# Altium PCB Proyecto_receptaculo_placa_interna_PCB.PcbDoc
Units mm, origin at the board's own origin, x right, y up, seen from the top; angles counter-clockwise.
Board outline 59.99 x 60 mm, 4 copper layers (Top Layer, Sources, Ground, Bottom Layer), stack 0.603 mm thick; 18 components, 16 nets, 66 pads, 43 vias.
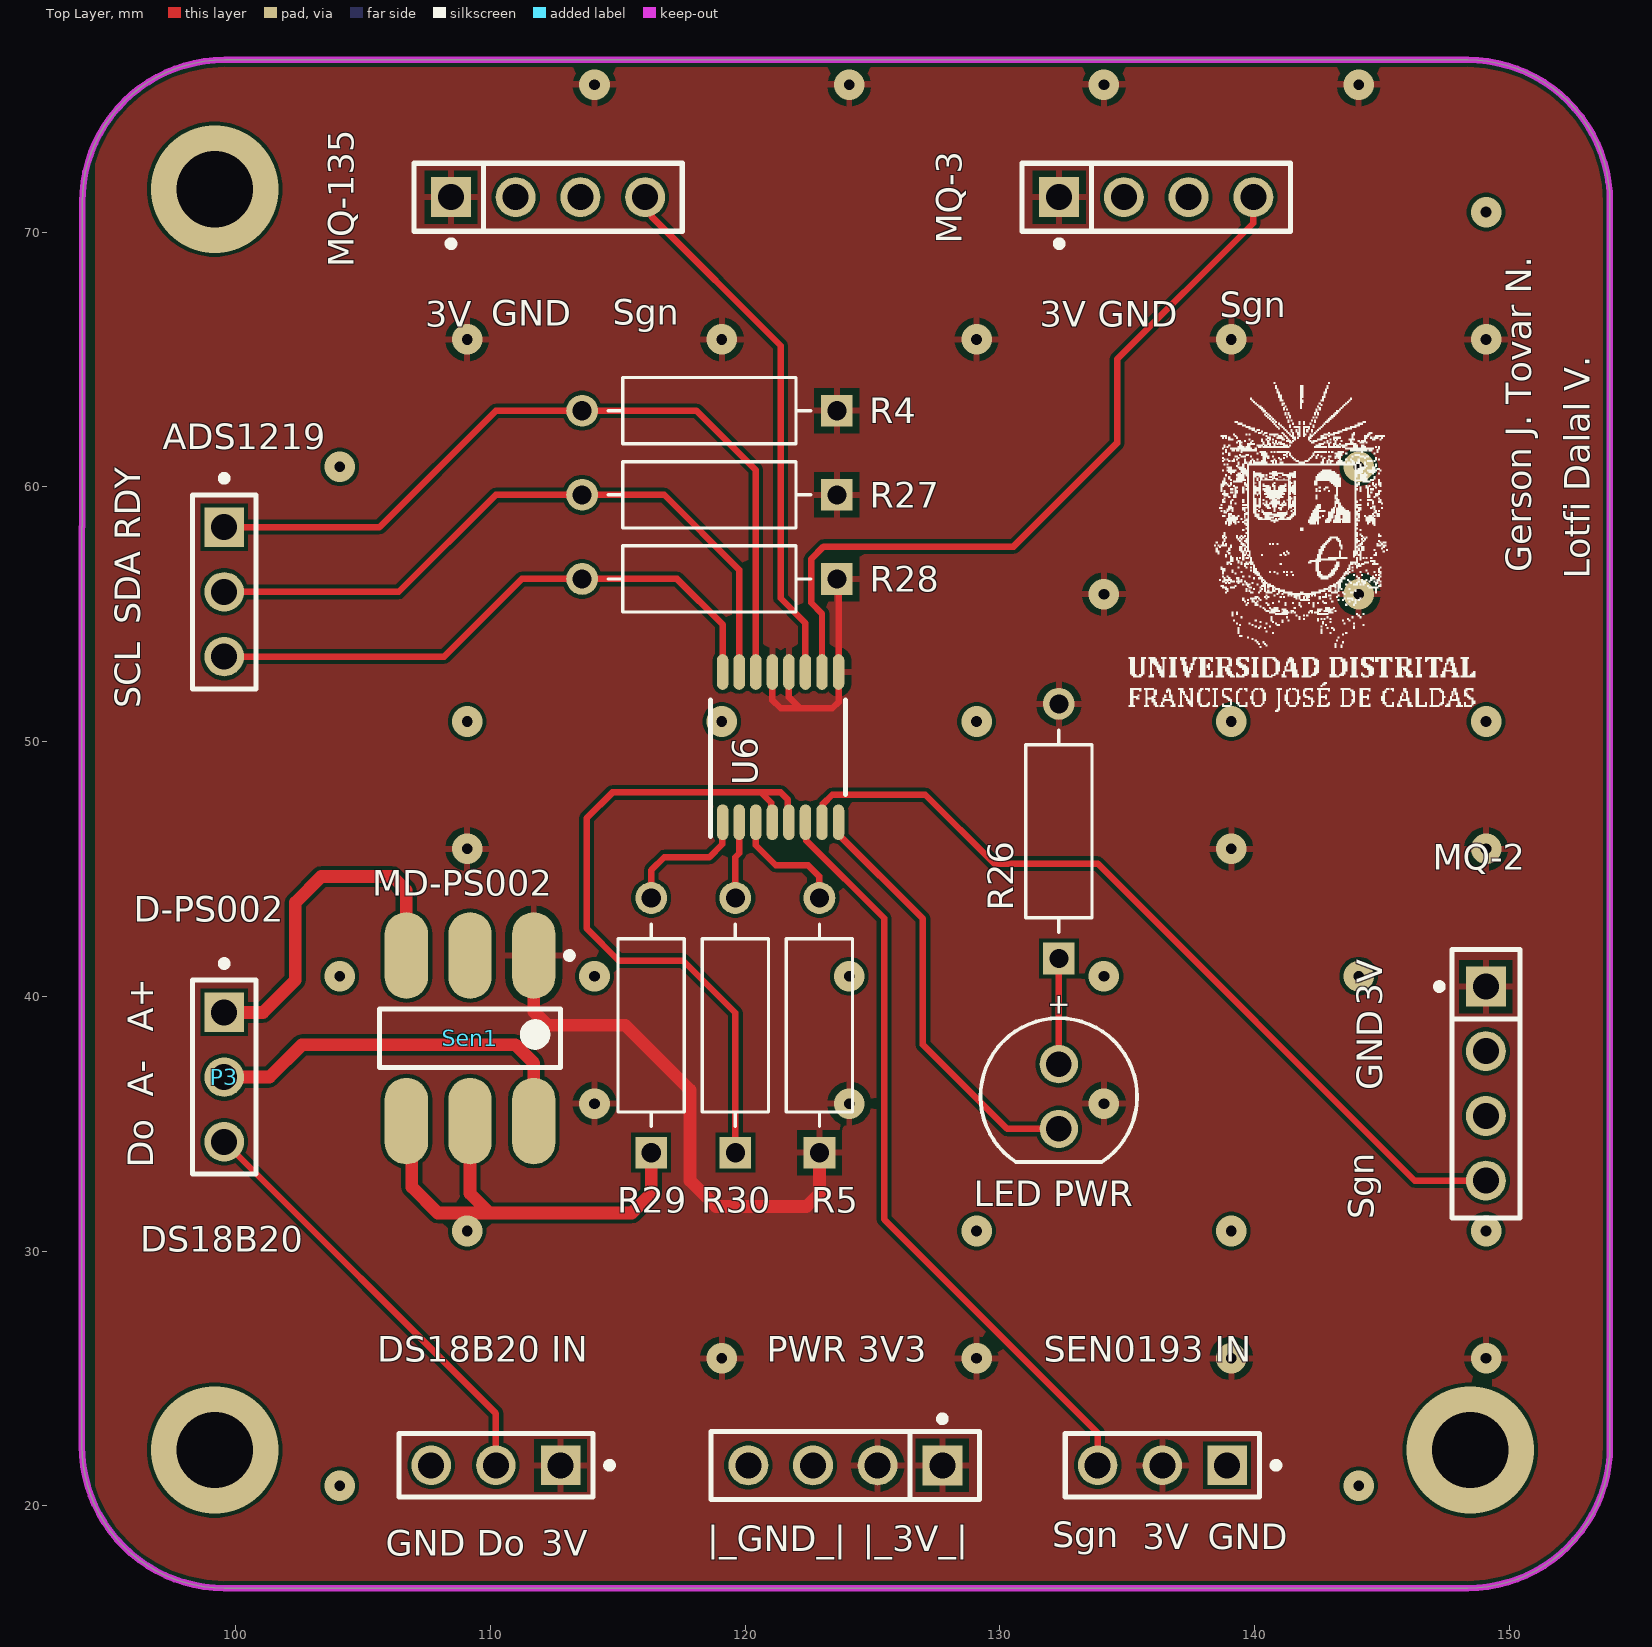
[diagram p0: Top Layer view]
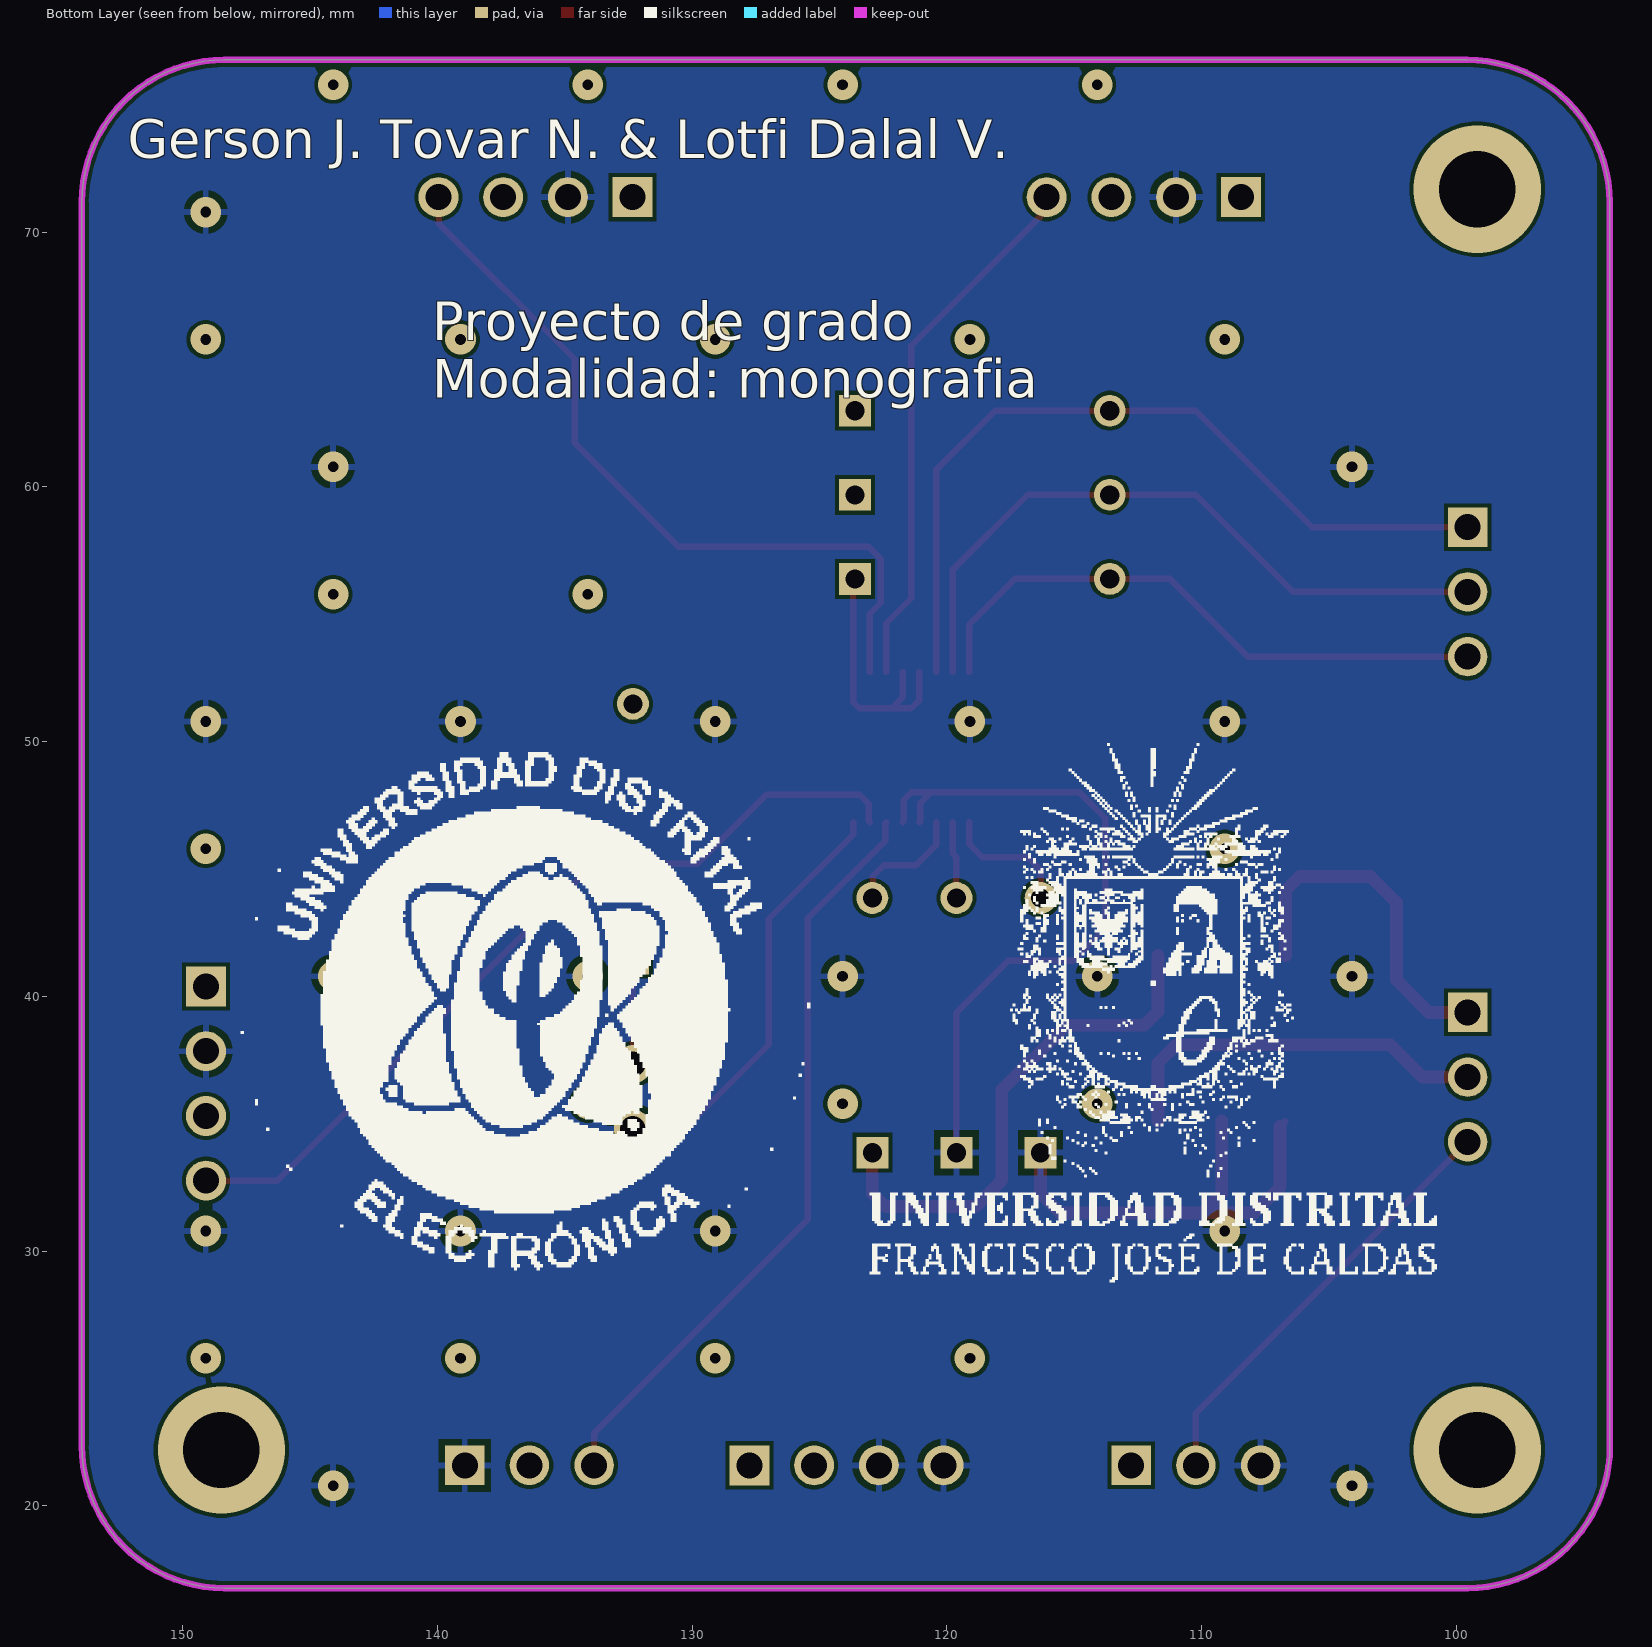
[diagram p1: Bottom Layer view, seen from below]
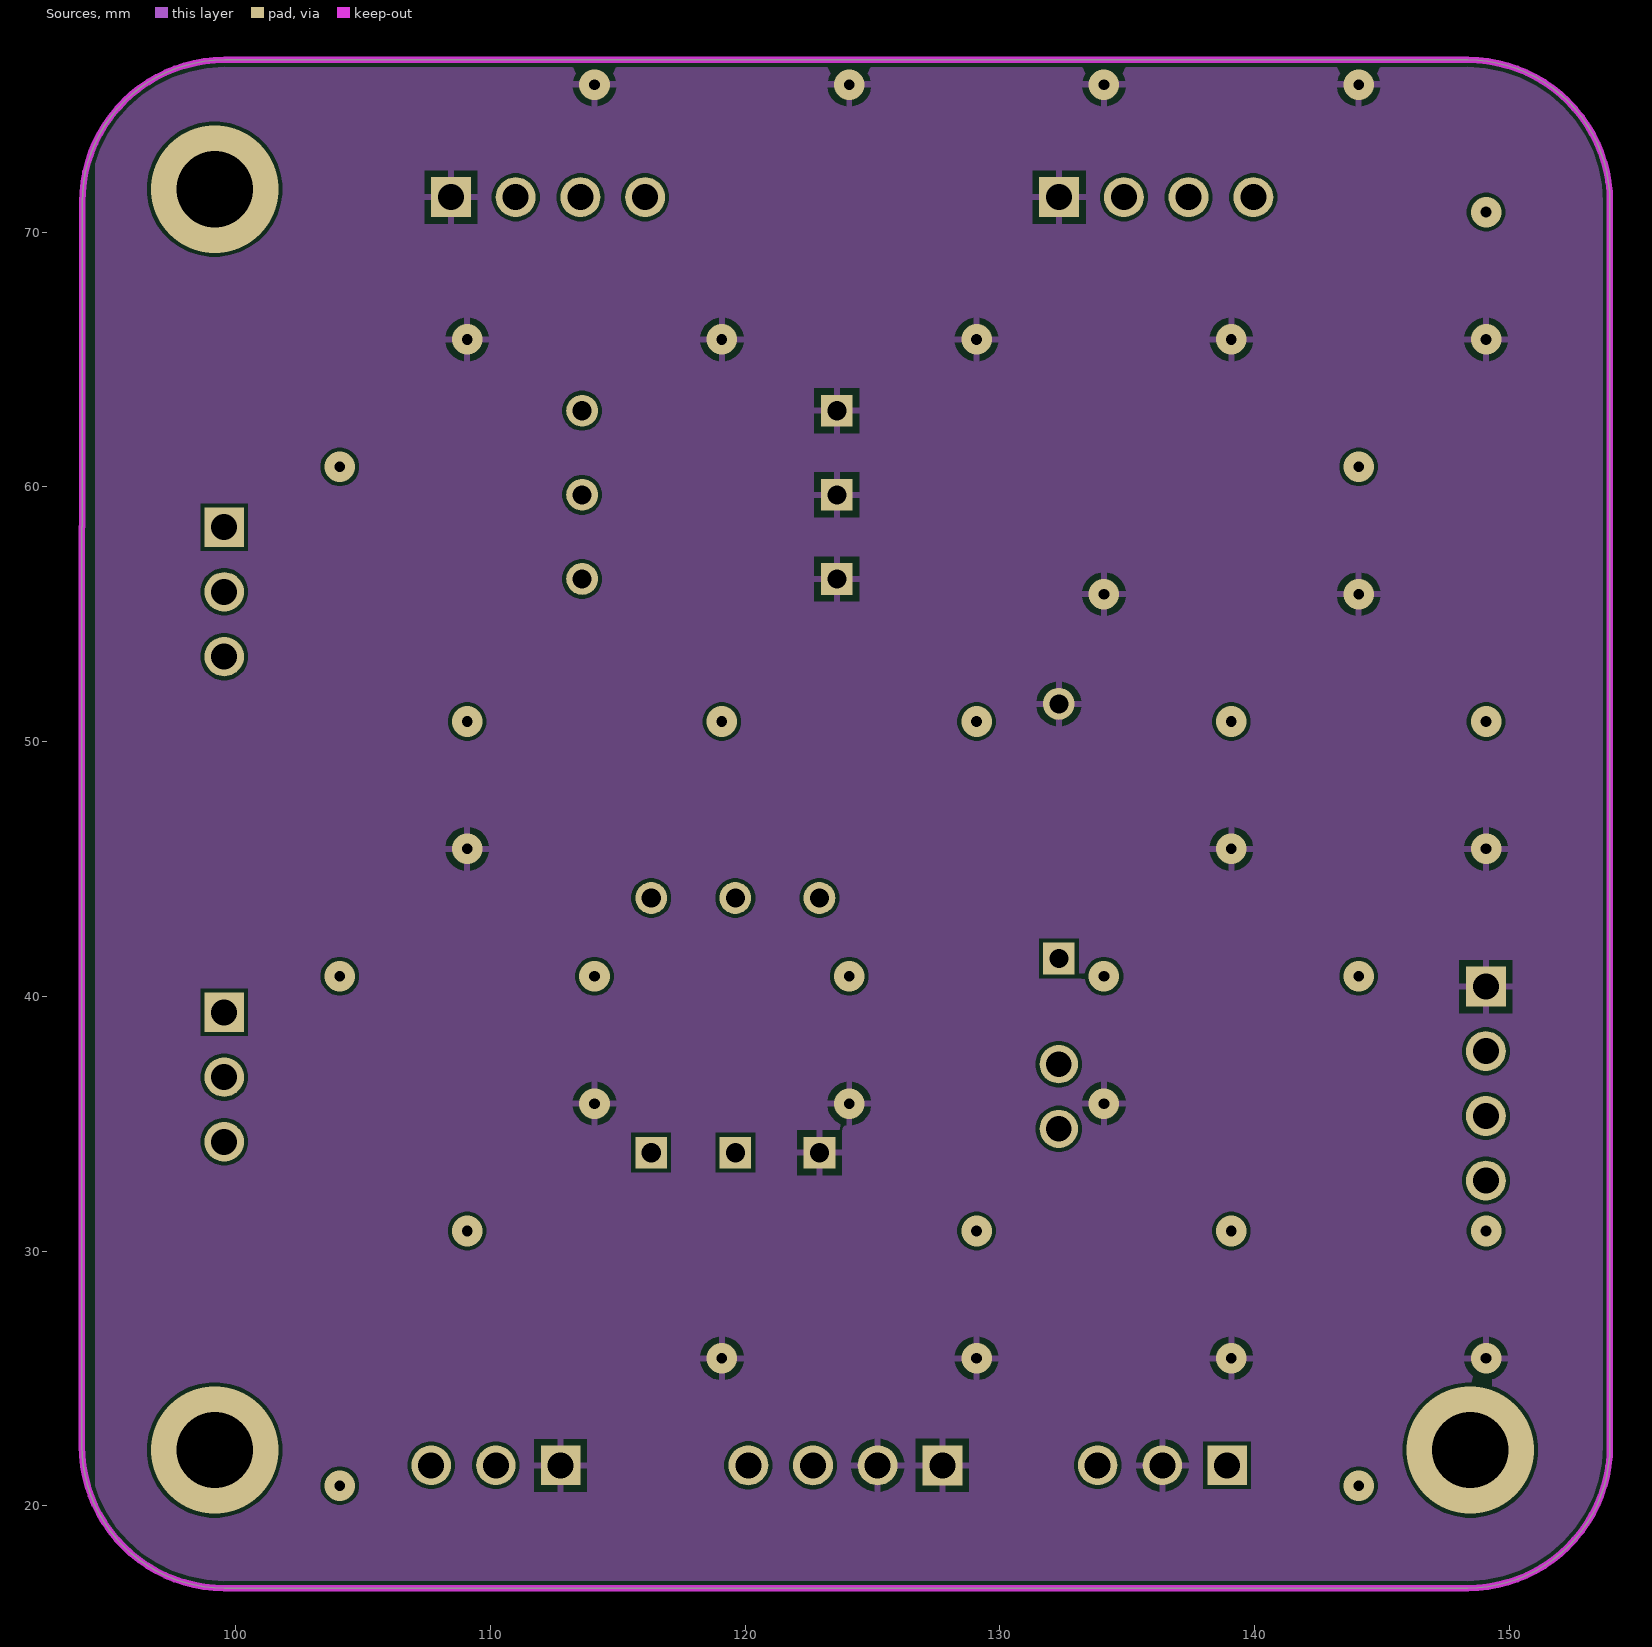
[diagram p2: Sources]
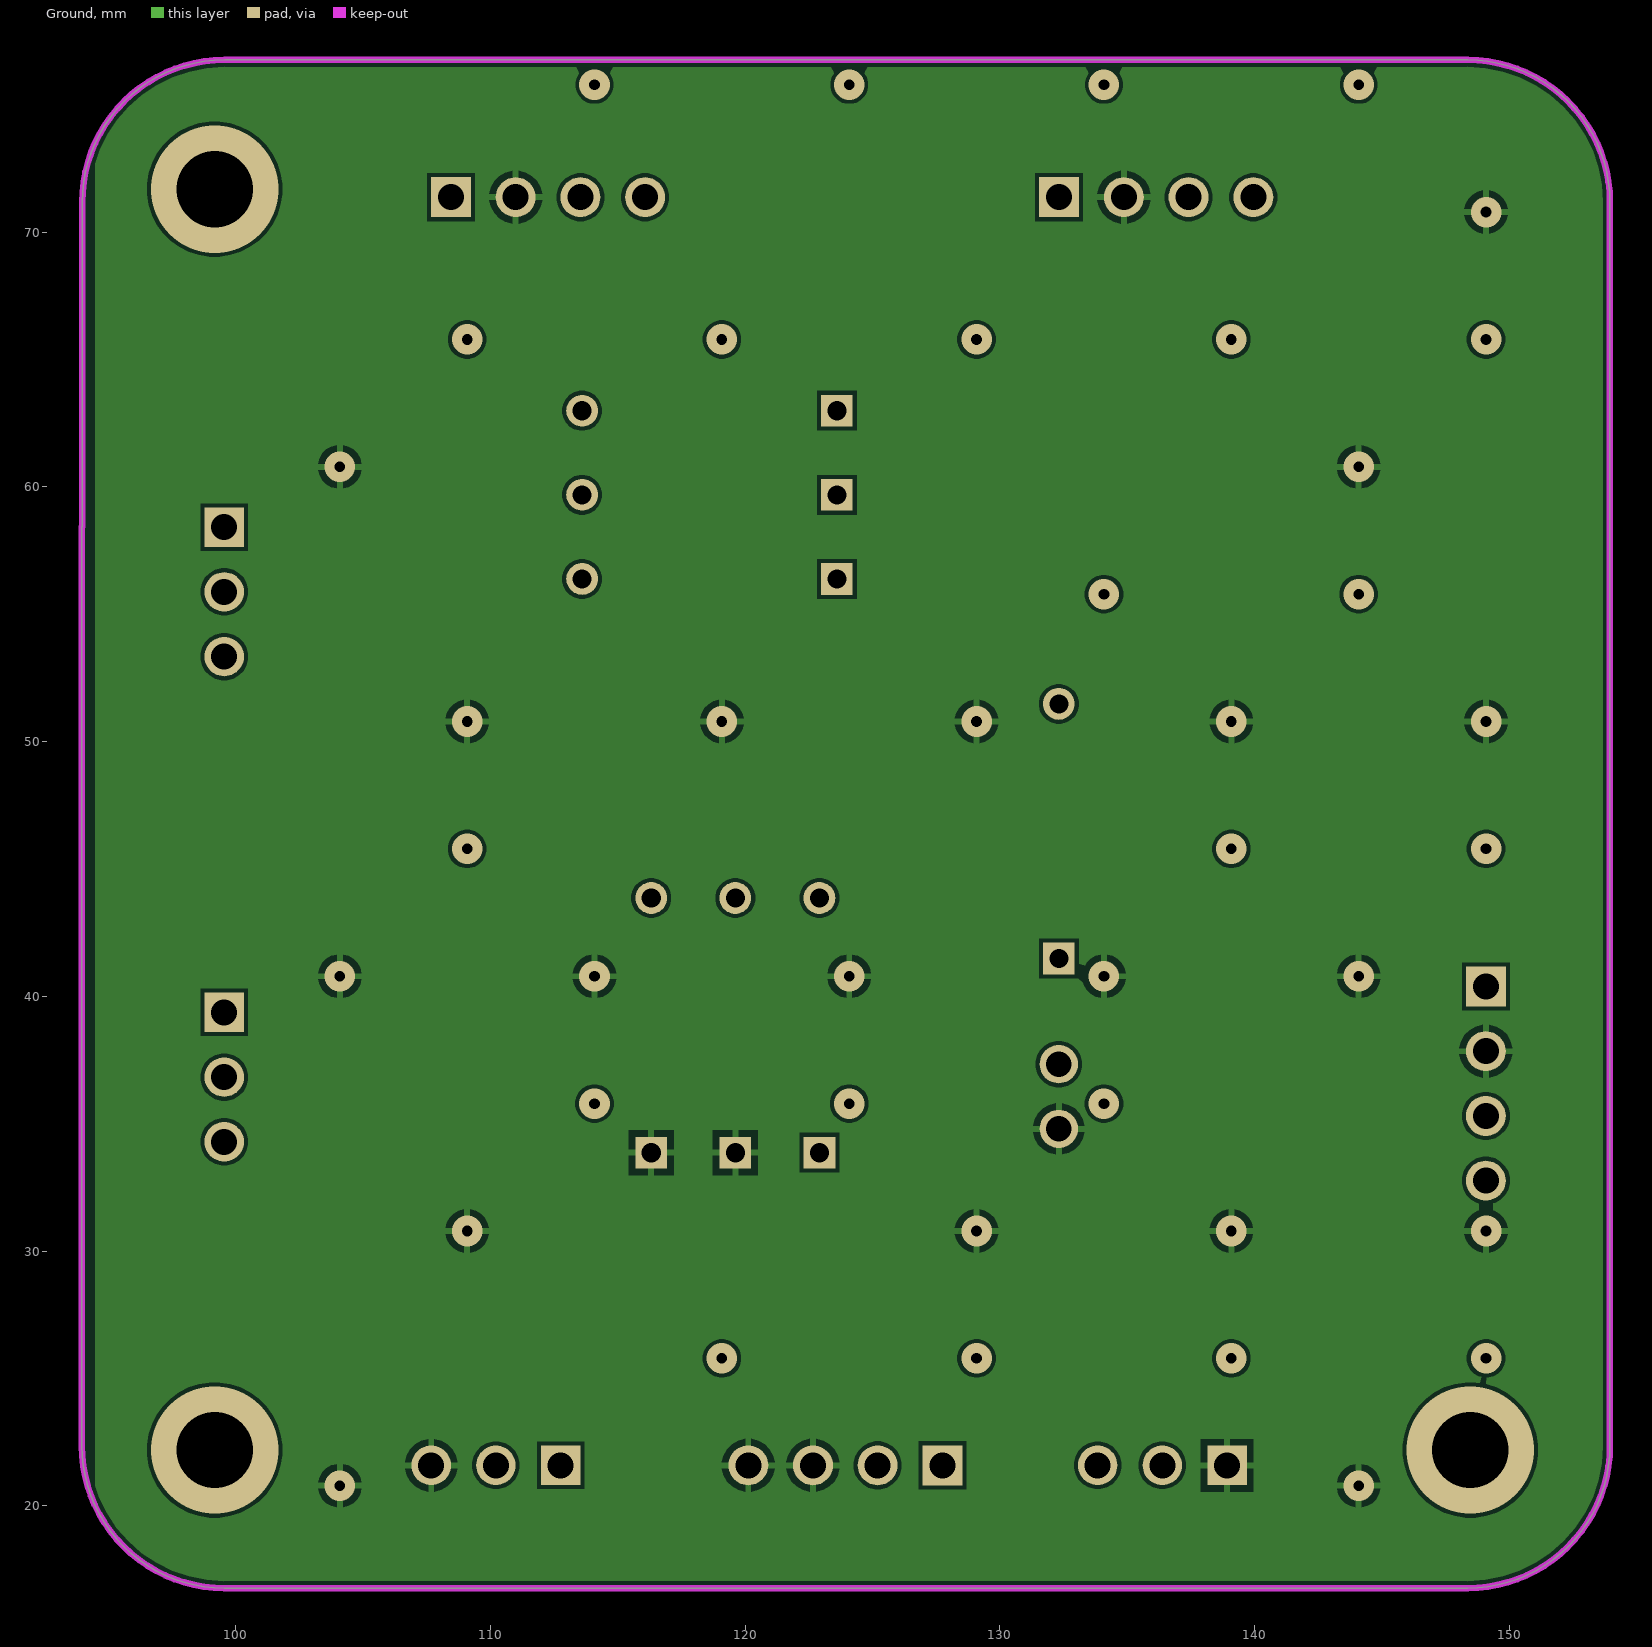
[diagram p3: Ground]
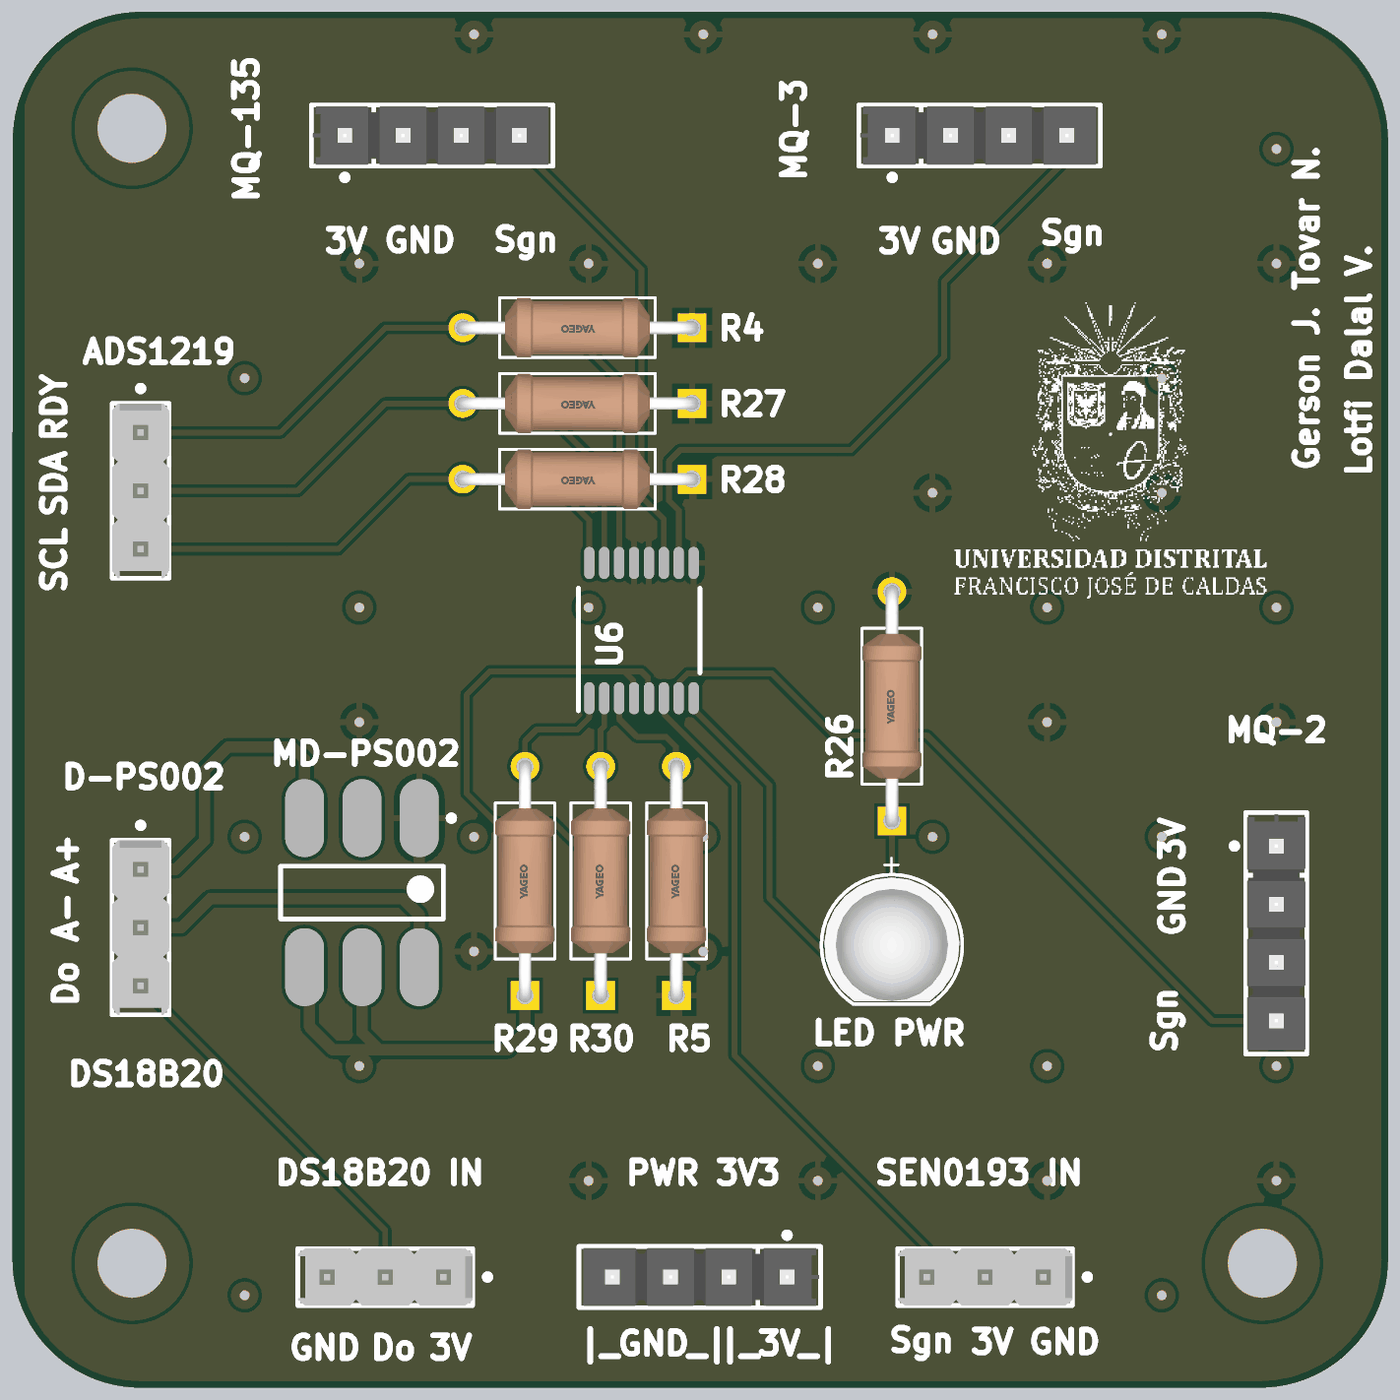
[diagram p4: 3D render of the assembled board from above, using the file's embedded part models]

## Layer stack, top to bottom
Top Solder: solder mask 0.0102, Solder Resist, Dk 3.5
Top Layer: signal copper 0.0356
Dielectric 2: prepreg 0.0711, PP-006, Dk 4.1
Sources: signal copper 0.035
Dielectric 1: dielectric 0.32, FR-4, Dk 4.8
Ground: signal copper 0.035
Dielectric 3: prepreg 0.0711, PP-006, Dk 4.1
Bottom Layer: signal copper 0.0356
Bottom Solder: solder mask 0.0102, Solder Resist, Dk 3.5

## Board outline
93.966,22.356 ccw(c99.554,22.356) 99.554,16.768 148.368,16.768 ccw(c148.368,22.356) 153.956,22.356 153.956,71.178 ccw(c148.368,71.178) 148.368,76.766 99.568,76.766 ccw(c99.568,71.178) 93.98,71.178 93.98,58.434 93.966,58.434

## Design rules (kind name [scope] priority, off if disabled: settings)
Clearance "Stitching GND2" [IsStitchingVia and InNet('GND2') vs (IsVia and (Not IsStitchingVia)) Or IsPad] p1: gap=0.127 ignorepadtopadclearanceinfootprint=TRUE
Clearance "Stitching NetD1_1" [IsStitchingVia and InNet('NetD1_1') vs (IsVia and (Not IsStitchingVia)) Or IsPad] p2: gap=0.127 ignorepadtopadclearanceinfootprint=FALSE
Clearance [All] p3: gap=0.15 ignorepadtopadclearanceinfootprint=TRUE
DiffPairsRouting [All] p1: maxlimit=0.15 minlimit=0.15 mostfreqgap=0.15 toplayer_minwidth=0.117 toplayer_maxwidth=0.117 toplayer_prefwidth=0.117 midlayer1_minwidth=0.064 midlayer1_maxwidth=0.064 midlayer1_prefwidth=0.064 midlayer2_minwidth=0.064 midlayer2_maxwidth=0.064 midlayer2_prefwidth=0.064 bottomlayer_minwidth=0.117 bottomlayer_maxwidth=0.117 bottomlayer_prefwidth=0.117 impedanceprofiledriven=TRUE impedanceprofileid={A861571A-2005-4FA9-A850-810DE9817C21} impedanceprofilevalue=90.000000 maxuncoupledlength=12.7
HoleSize [All] p1: absolutevalues=TRUE maxlimit=5 minlimit=0.3 maxpercent=80.000 minpercent=20.000
MinimumSolderMaskSliver [All] p1: minsoldermaskwidth=0.19
PolygonConnect [All] p1: connectstyle=Relief reliefconductorwidth=0.254 reliefentries=4 polygonreliefangle="90 Angle" airgapwidth=0.254
RoutingVias [All] p1: holewidth=0.711 width=1.27 viastyle="Through Hole" minholewidth=0.3 minwidth=1.27 maxholewidth=5 maxwidth=5.2
SilkToSilkClearance [All] p1: silktosilkclearance=0
SilkToSolderMaskClearance [IsPad] p1: minsilkscreentomaskgap=0 clearancetoexposedcopper=TRUE
SolderMaskExpansion [All] p1: expansion=0.102 istentingtop=TRUE
SolderMaskExpansion SolderMaskExpansion_Vias [IsVia] p2: expansion=0.102 istentingtop=TRUE
SupplyNets "Schematic Supply Nets_3" [InNet('GND2')] p1: voltage=0.000
SupplyNets "Schematic Supply Nets_2" [InNet('3V3_VCC')] p2: voltage=0.000
UnRoutedNet [InNet('No Net')] p1:
Width [All] p1: maxlimit=5 minlimit=0.116 preferedwidth=0.254
24 further rules are at their usual default settings.

## Components (designator, comment, footprint, x,y, rotation, side; value= is the part's Value field where it differs from the comment)
ADS1219 "22-28-4033" MOLX-22-28-4033_V 99.554,55.88 r270 top (schematic designator P5)
"DS18B20 IN" "22-28-4033" MOLX-22-28-4033_V 110.222,21.59 r180 top (schematic designator P6)
"LED PWR" "151051BS04000" WL-TMRC_D5.9H8.7 132.32,36.068 r270 top (schematic designator D7)
MQ-2 "TSW-104-23-T-S" FP-TSW-104-23-T-S-MFG 149.084,36.576 r270 top (schematic designator J13)
MQ-3 "TSW-104-23-T-S" FP-TSW-104-23-T-S-MFG 136.144,71.374 r0 top (schematic designator J11)
MQ-135 "TSW-104-23-T-S" FP-TSW-104-23-T-S-MFG 112.268,71.374 r0 top (schematic designator J10)
P3 "22-28-4033" MOLX-22-28-4033_V 99.554,36.83 r270 top
"PWR 3V3" "TSW-104-23-T-S" FP-TSW-104-23-T-S-MFG 123.938,21.59 r180 top (schematic designator J12)
R4 "10 kOhms" FP-FMP100-MFG 118.604,62.992 r180 top
R5 "10 kOhms" FP-FMP100-MFG 122.922,38.862 r90 top
R26 "1 kOhms" FP-FMP100-MFG 132.32,46.482 r90 top
R27 "2.2 kOhms" FP-FMP100-MFG 118.604,59.69 r180 top
R28 "2.2 kOhms" FP-FMP100-MFG 118.604,56.388 r180 top
R29 "10 kOhms" FP-FMP100-MFG 116.318,38.862 r90 top
R30 "10 kOhms" FP-FMP100-MFG 119.62,38.862 r90 top
Sen1 "MD-PS002" "SPO-6 (MD-PS002)" 109.206,38.354 r270 top
"SEN0193 IN" "22-28-4033" MOLX-22-28-4033_V 136.384,21.59 r180 top (schematic designator P4)
U6 "ADS1219IPWT" PW0016A_N 121.398,49.784 r90 top

## Footprints (in the part's own frame and the unit in brackets; to place one, negate y for a bottom-side part, rotate by r counter-clockwise, add the part's x,y. Pads: shape width x height; smd on the part's side, far side on the other; paste and mask are expansions set on the pad)
FP-FMP100-MFG [mm]
  rect 1.25x1.25 hole 0.75 paste-2539.97 mask+0: 1(-5,0)
  round 1.25 hole 0.75 paste-2539.97 mask+0: 2(5,0)
  silkscreen extent -3.98,-1.3 3.98,1.3, body extent -5.72,-1.4 5.72,1.4, height 0.25
FP-TSW-104-23-T-S-MFG [mm]
  rect 1.57x1.57 hole 1.02 paste-2539.97 mask+0: 1(-3.81,0)
  round 1.57 hole 1.02 paste-2539.97 mask+0: 2(-1.27,0) 3(1.27,0) 4(3.81,0)
  silkscreen extent -5.27,-1.95 5.27,1.34, body extent -5.37,-1.44 5.37,1.44, height 0.25
MOLX-22-28-4033_V [mm] "THD, 3-Leads, Body 7.62x2.49mm, Pitch 2.54mm"
  rect 1.55x1.55 hole 1.02: 1(-2.54,0)
  round 1.55 hole 1.02: 2(0,0) 3(2.54,0)
  silkscreen extent -4.58,-1.24 3.81,1.24, body extent -3.81,-1.24 3.81,1.24, height 8.38
PW0016A_N [mm]
  oval 1.4x0.45 smd paste+0 mask+0: 1(-2.95,2.275) 2(-2.95,1.625) 3(-2.95,0.975) 4(-2.95,0.325) 5(-2.95,-0.325) 6(-2.95,-0.975) 7(-2.95,-1.625) 8(-2.95,-2.275) 9(2.95,-2.275) 10(2.95,-1.625) 11(2.95,-0.975) 12(2.95,-0.325) 13(2.95,0.325) 14(2.95,0.975) 15(2.95,1.625) 16(2.95,2.275)
  silkscreen extent -3.5,-2.55 1.85,2.75
"SPO-6 (MD-PS002)" [mm]
  oval 3.4x1.7 smd: 1(-3.25,2.5) 2(-3.25,0) 3(-3.25,-2.5) 4(3.25,-2.5) 5(3.25,0) 6(3.25,2.5)
  silkscreen extent -3.37,-3.55 1.15,4.03, body extent -1.55,-3.55 1.55,3.55, height 3.5
WL-TMRC_D5.9H8.7 [mm] "THT Mono-color Round Color LED, 2-leads"
  round 1.5 hole 1: 1(-1.27,0) 2(1.27,0)
  silkscreen extent -3.07,-3.07 2.58,3.08, body extent -2.95,-2.95 2.45,2.95, height 9.2

## Part data
ADS1219 "DS18B20 IN" P3 "SEN0193 IN": library part CMP-1676-00001-5, "Male Header, Pitch 2.54 mm, 1 x 3 Position, Height 8.38 mm, Tail Length 3.18 mm, RoHS, Bulk", Colour=Black, Current Rating="4 A", Manufacturer=Molex, Max Operating Temperature="75 degC", Min Operating Temperature="0 degC", Package Quantity=1, Voltage Rating="250 V", ComponentLink1Description="Manufacturer URL", ComponentLink1URL=http://www.molex.com/, ComponentLink2Description=Datasheet, ComponentLink2URL=http://www.molex.com/pdm_docs/sd/022284033_sd.pdf, Contact Finish=Gold, Contact Material=Brass, Contact Plating=Gold, DatasheetVersion="Rev. G, 01/2012", Height="8.38 mm", Lead Pitch="0.1 inch", Length="7.62 mm", Mount="Through Hole", Mounting Technology="Through Hole", PackageDescription="Male Header, Pitch 2.54 mm, 1 x 3 Position, Height 8.38 mm, Tail Length 3.18 mm", PackageReference=22-28-4033, Packaging=Bulk, Pins=3, REACH SVHC=Unknown, RoHSCompliant=true, Rows=1
"LED PWR": library part CMP-1488-00009-2, Case/Package=Radial, Color=Blue, Forward Current=100mA, Forward Voltage=3.2V, Max Operating Temperature=85°C, Max Reverse Voltage (DC)=5V, Min Operating Temperature=-40°C, Test Current=20mA, Dominant Wavelength=470nm, Height=8.6mm, Length=5mm, Lens Size=5mm, Lens Style="Circular, Diffused, Round", Luminous Intensity=500mcd, Mount="Through Hole", NexarPartId=29717812, Packaging=Bulk, Peak Wavelength=465nm, REACH SVHC=Unknown, RoHS=Compliant, Viewing Angle=40°, Wavelength=470nm, Width=5mm
MQ-2 MQ-3 MQ-135 "PWR 3V3": library part CMP-02766-001388-1, "CONN HEADER VERT 4POS 2.54MM", Color=Black, Max Current Rating=7.6A, Max Operating Temperature=105°C, Max Voltage Rating (AC)=550V, Min Operating Temperature=-55°C, Package Quantity=1, Connector Type="Male Pin", Contact Material=Bronze, Contact Mating Length=0.23inch, Contact Plating=Tin, Contact Type="Male Pin", Depth=2.54mm, Gender=Male, Housing Color=Black, Housing Material=Polyester, Lead Free="Lead Free", Length=10.16mm, Mount="Through Hole", Number of Contacts=4, Number of Positions=4, Number Of Rows=1, Orientation=Straight, Packaging=Bulk, Pitch=2.54mm, Radiation Hardening=No, REACH SVHC="No SVHC", RoHS Compliant=Yes, Series=TSW, Termination=Solder, Width=2.54mm
R4 R5 R26 R27 R28 R29 R30: library part CMP-00621-25629781-1, "Resistor, 1 kOhm, ± 5%, 1 W, Axial Leaded, Metal Film, High Power Flame Proof", Case/Package=Conformal, Max Operating Temperature=155°C, Min Operating Temperature=-55°C, Power Rating=1W, Resistance=1kΩ, Temperature Coefficient=100ppm/°C, Tolerance=5%, Composition="Metal Film", Diameter=2.4mm, Lead Free="Lead Free", Length=6.3mm, Military Standard=Not, Mount="Through Hole", Radiation Hardening=No, RoHS=Compliant, Schedule B="8533210090, 8533210090", Termination=Axial
Sen1: "Absolute pressure sensor", ComponentLink2Description=datasheet, ComponentLink2URL=https://electronperdido.com/wp-content/uploads/2021/12/MD_PS002-Datasheet.zh-CN.en_.pdf, ComponentLink3Description=suplier, ComponentLink3URL=https://www.mactronica.com.co/sensor-de-presion-absoluta-md-ps002?srsltid=AfmBOorZAiXsJNmkeTgQPVhJ-_m5m52EX53D2zdWt7F5gRHtJGt4LCYa, Pressure="150 KPa", Topology="wheatstone bridge"
U6: "24-bit, 1kSPS, 4-ch general-purpose delta-sigma ADC with I2C interface and external Vref inputs 16-TSSOP -40 to 125", Manufacturer_Name="Texas Instruments", Copyright="Copyright (C) 2025 Ultra Librarian. All rights reserved.", Datasheet=https://www.ti.com/lit/gpn/ads1219, Manufacturer_Part_Number=ADS1219IPWT, RefDes=RefDes, Type=TYPE

## Via types
v1: diameter 1.2, hole 0.42, Top Layer to Bottom Layer, tented both sides, 40 vias
v2: diameter 5, hole 3, Top Layer to Bottom Layer, 3 vias

## Nets (pads, with @x,y where several pads share a name; then routed paths per layer and width w, separated by ;. In a path a pad name is that pad's centre, name@x,y a point inside that pad or via, vN(x,y) a via of type N, cw(c..) or ccw(c..) an arc to the next point about the centre after c; other vN are vias at no path point)
3V3_VCC: "DS18B20 IN.1" "PWR 3V3.1" "PWR 3V3.2" "SEN0193 IN.2" MQ-2.1 MQ-3.1 MQ-135.1 R4.1 R5.1 R26.2 R27.1 R28.1 Sen1.1 U6.9 U6.12 U6.13 | length 30.9
  Top Layer w0.254: U6.13 121.073,51.633 121.398,51.308 122.16,51.308 ; U6.12 121.723,51.745 122.16,51.308 ; R28.1 123.673,56.319 U6.9 123.673,51.551 123.43,51.308 122.16,51.308
  Top Layer w0.5: Sen1.1 111.706,39.41 112.254,38.862 115.302,38.862 117.842,36.322 117.842,32.766 118.858,31.75 122.414,31.75 122.922,32.258 R5.1
  other v1: 119.092,25.79 129.092,25.79 139.092,25.79 149.092,25.79 114.092,35.79 124.092,35.79 134.092,35.79 109.092,45.79 139.092,45.79 149.092,45.79 134.092,55.79 144.092,55.79 109.092,65.79 119.092,65.79 129.092,65.79 139.092,65.79 149.092,65.79 114.092,75.79 124.092,75.79 134.092,75.79 144.092,75.79
GND2: "DS18B20 IN.3" "LED PWR.2" "PWR 3V3.3" "PWR 3V3.4" "SEN0193 IN.1" MQ-2.2 MQ-3.2 MQ-135.2 R29.1 R30.1 Sen1.4 Sen1.5 U6.4 U6.5 U6.8 | length 62.9
  Top Layer w0.254: Sen1.4 Sen1.4@106.92,34.89 ; R30.1 119.62,39.362 117.58,41.402 115.048,41.402 113.778,42.672 113.778,46.99 114.794,48.006 120.636,48.006 ; U6.4 121.035,46.872 121.035,47.607 120.636,48.006 ; U6.5 121.685,46.872 121.685,47.719 121.398,48.006 120.636,48.006 ; U6.8 123.673,46.359 126.986,43.046 126.986,38.1 130.288,34.798 132.32,34.798
  Top Layer w0.5: Sen1.4@106.92,34.89 106.92,32.512 107.936,31.496 109.968,31.496 ; Sen1.5 109.206,32.258 109.968,31.496 ; R29.1 116.318,32.258 115.556,31.496 109.968,31.496
  other v1: 104.092,20.79 144.092,20.79 109.092,30.79 129.092,30.79 139.092,30.79 149.092,30.79 104.092,40.79 114.092,40.79 124.092,40.79 134.092,40.79 144.092,40.79 109.092,50.79 119.092,50.79 129.092,50.79 139.092,50.79 149.092,50.79 104.092,60.79 144.092,60.79 149.092,70.79
NetADS1219_1: ADS1219.1 R4.2 U6.14 | length 31.7
  Top Layer w0.254: ADS1219.1 105.65,58.42 110.222,62.992 R4.2 118.096,62.992 120.423,60.665 U6.14
NetADS1219_2: ADS1219.2 R27.2 U6.15 | length 27
  Top Layer w0.254: ADS1219.2 106.412,55.88 110.222,59.69 R27.2 116.826,59.69 119.773,56.743 U6.15
NetADS1219_3: ADS1219.3 R28.2 U6.16 | length 23.4
  Top Layer w0.254: ADS1219.3 108.19,53.34 111.238,56.388 R28.2 117.334,56.388 119.123,54.599 U6.16
"NetDS18B20 IN_2": "DS18B20 IN.2" P3.3 | length 17.1
  Top Layer w0.254: P3.3 110.222,23.622 110.222,21.59
"NetLED PWR_1": "LED PWR.1" R26.1 | length 4.1
  Top Layer w0.254: 132.32,37.338 R26.1
NetMQ-2_4: MQ-2.4 U6.7 | length 33.2
  Top Layer w0.254: U6.7 123.061,46.872 123.061,47.554 123.422,47.915 127.077,47.915 129.78,45.212 133.844,45.212 146.29,32.766 MQ-2.4
NetMQ-3_4: MQ-3.4 U6.10 | length 30.3
  Top Layer w0.254: U6.10 123.023,55.023 122.598,55.448 122.598,57.171 123.085,57.658 130.542,57.658 134.606,61.722 134.606,65.01 139.953,70.357 139.953,70.961 MQ-3.4@140.208,71.217
NetMQ-135_4: MQ-135.4 U6.11 | length 21.2
  Top Layer w0.254: MQ-135.4 116.33,71.122 116.33,70.614 121.398,65.546 121.398,55.626 122.373,54.651 U6.11
NetP3_1: P3.1 Sen1.3 | length 13.9
  Top Layer w0.5: P3.1 101.078,39.37 102.348,40.64 102.348,43.688 103.364,44.704 106.158,44.704 106.706,44.156 Sen1.3
NetP3_2: P3.2 Sen1.6 | length 15.3
  Top Layer w0.5: P3.2 101.332,36.83 102.602,38.1 110.984,38.1 111.706,37.378 Sen1.6
NetR5_2: R5.2 U6.3 | length 4.8
  Top Layer w0.254: U6.3 120.423,45.933 121.205,45.151 122.475,45.151 122.907,44.719 122.907,43.877 R5.2
NetR29_2: R29.2 U6.1 | length 5.2
  Top Layer w0.254: R29.2 116.318,44.958 116.826,45.466 118.604,45.466 119.112,45.974 119.112,46.823 U6.1
NetR30_2: R30.2 U6.2 | length 3
  Top Layer w0.254: R30.2 119.62,45.466 119.773,45.619 U6.2
"NetSEN0193 IN_3": "SEN0193 IN.3" U6.6 | length 30
  Top Layer w0.254: U6.6 122.411,46.796 122.411,46.114 125.462,43.063 125.462,31.242 133.844,22.86 133.844,21.59
pads on no net: MQ-2.3 MQ-3.3 MQ-135.3 Sen1.2
copper on no net:
  other v2: 99.176,22.19 148.476,22.19 99.176,71.69

## Polygon pours and split planes (outlines as drawn)
GND2 on Bottom Layer "GND2_L04_P015" (solid, remove dead copper, pour order 15): 150.608,76.708 153.91,73.406 153.91,20.066 150.608,16.764 97.014,16.764 94.488,19.29 94.488,73.928 97.268,76.708
GND2 on Ground "GND2_L03_P014" (solid, remove dead copper, pour order 14): 150.608,76.708 153.91,73.406 153.91,20.066 150.608,16.764 97.014,16.764 94.488,19.29 94.488,73.928 97.268,76.708
3V3_VCC on Sources "3V3_VCC_L02_P013" (solid, remove dead copper, pour order 13): 150.608,76.708 153.91,73.406 153.91,20.066 150.608,16.764 97.014,16.764 94.488,19.29 94.488,73.928 97.268,76.708
3V3_VCC on Top Layer "3V3_VCC_L01_P016" (solid, remove dead copper, pour order 16): 150.608,76.708 153.91,73.406 153.91,20.066 150.608,16.764 97.014,16.764 94.488,19.29 94.488,73.928 97.268,76.708

## Keep-outs
Keep-Out Layer:
  lines w0.254: 93.966,58.434 93.966,22.356 ccw(c99.554,22.356) 99.554,16.768 148.368,16.768 ccw(c148.368,22.356) 153.956,22.356 153.956,71.178 ccw(c148.368,71.178) 148.368,76.766 99.568,76.766 ccw(c99.568,71.178) 93.98,71.178 93.98,58.434

## Silkscreen, mask and mechanical layers (free items; w line width, h text height)
Top Overlay:
  drawing of 669 lines, arcs and shapes, not listed
  text "Sgn" at 138.647,66.667 h1
  text "Sgn" at 114.808,66.373 h1
  text "GND" at 110.045,66.333 h1
  text "3V" at 107.442,66.294 h1
  text "3V" at 131.572,66.294 h1
  text "GND" at 133.858,66.294 h1
  text "RDY" at 96.252,57.912 h1 r90
  text "Gerson J. Tovar N." at 150.876,56.642 h1 r90
  text "Lotfi Dalal V." at 153.162,56.388 h1 r90
  text "SDA" at 96.252,54.61 h1 r90
  text "SCL" at 96.252,51.308 h1 r90
  text "D-PS002" at 95.998,42.926 h1
  text "3V" at 145.02,39.624 h1 r90
  text "A+" at 96.76,38.608 h1 r90
  text "GND" at 145.02,36.322 h1 r90
  text "A-" at 96.76,36.068 h1 r90
  text "Do" at 96.76,33.274 h1 r90
  text "Sgn" at 144.687,31.242 h1 r90
  text "DS18B20" at 96.252,29.972 h1
  text "Sgn" at 132.066,18.367 h1
  text "3V" at 135.622,18.288 h1
  text "GND" at 138.162,18.288 h1
  text "|_GND_|" at 118.52,18.218 h1
  text "|_3V_|" at 124.616,18.218 h1
  text "GND" at 105.904,18.034 h1
  text "Do" at 109.46,18.034 h1
  text "3V" at 112,18.034 h1
Bottom Overlay:
  drawing of 727 lines, arcs and shapes, not listed
  text "Gerson J. Tovar N. & Lotfi Dalal V." at 152.146,72.898 h1.5
  text "Proyecto de grado / Modalidad: monografia" at 140.208,63.5 h1.5

## Text inside footprints (layer, text, board x,y; h text height)
"LED PWR": Top Overlay "+" at 131.99,40.118 h0.8 r270
U6: Top Overlay "RefDes" at 122.033,47.879 h0 r90